# EAGLE board OOBD-Cup_v5-EuroPCB (EAGLE 5.11), part 1 of 4
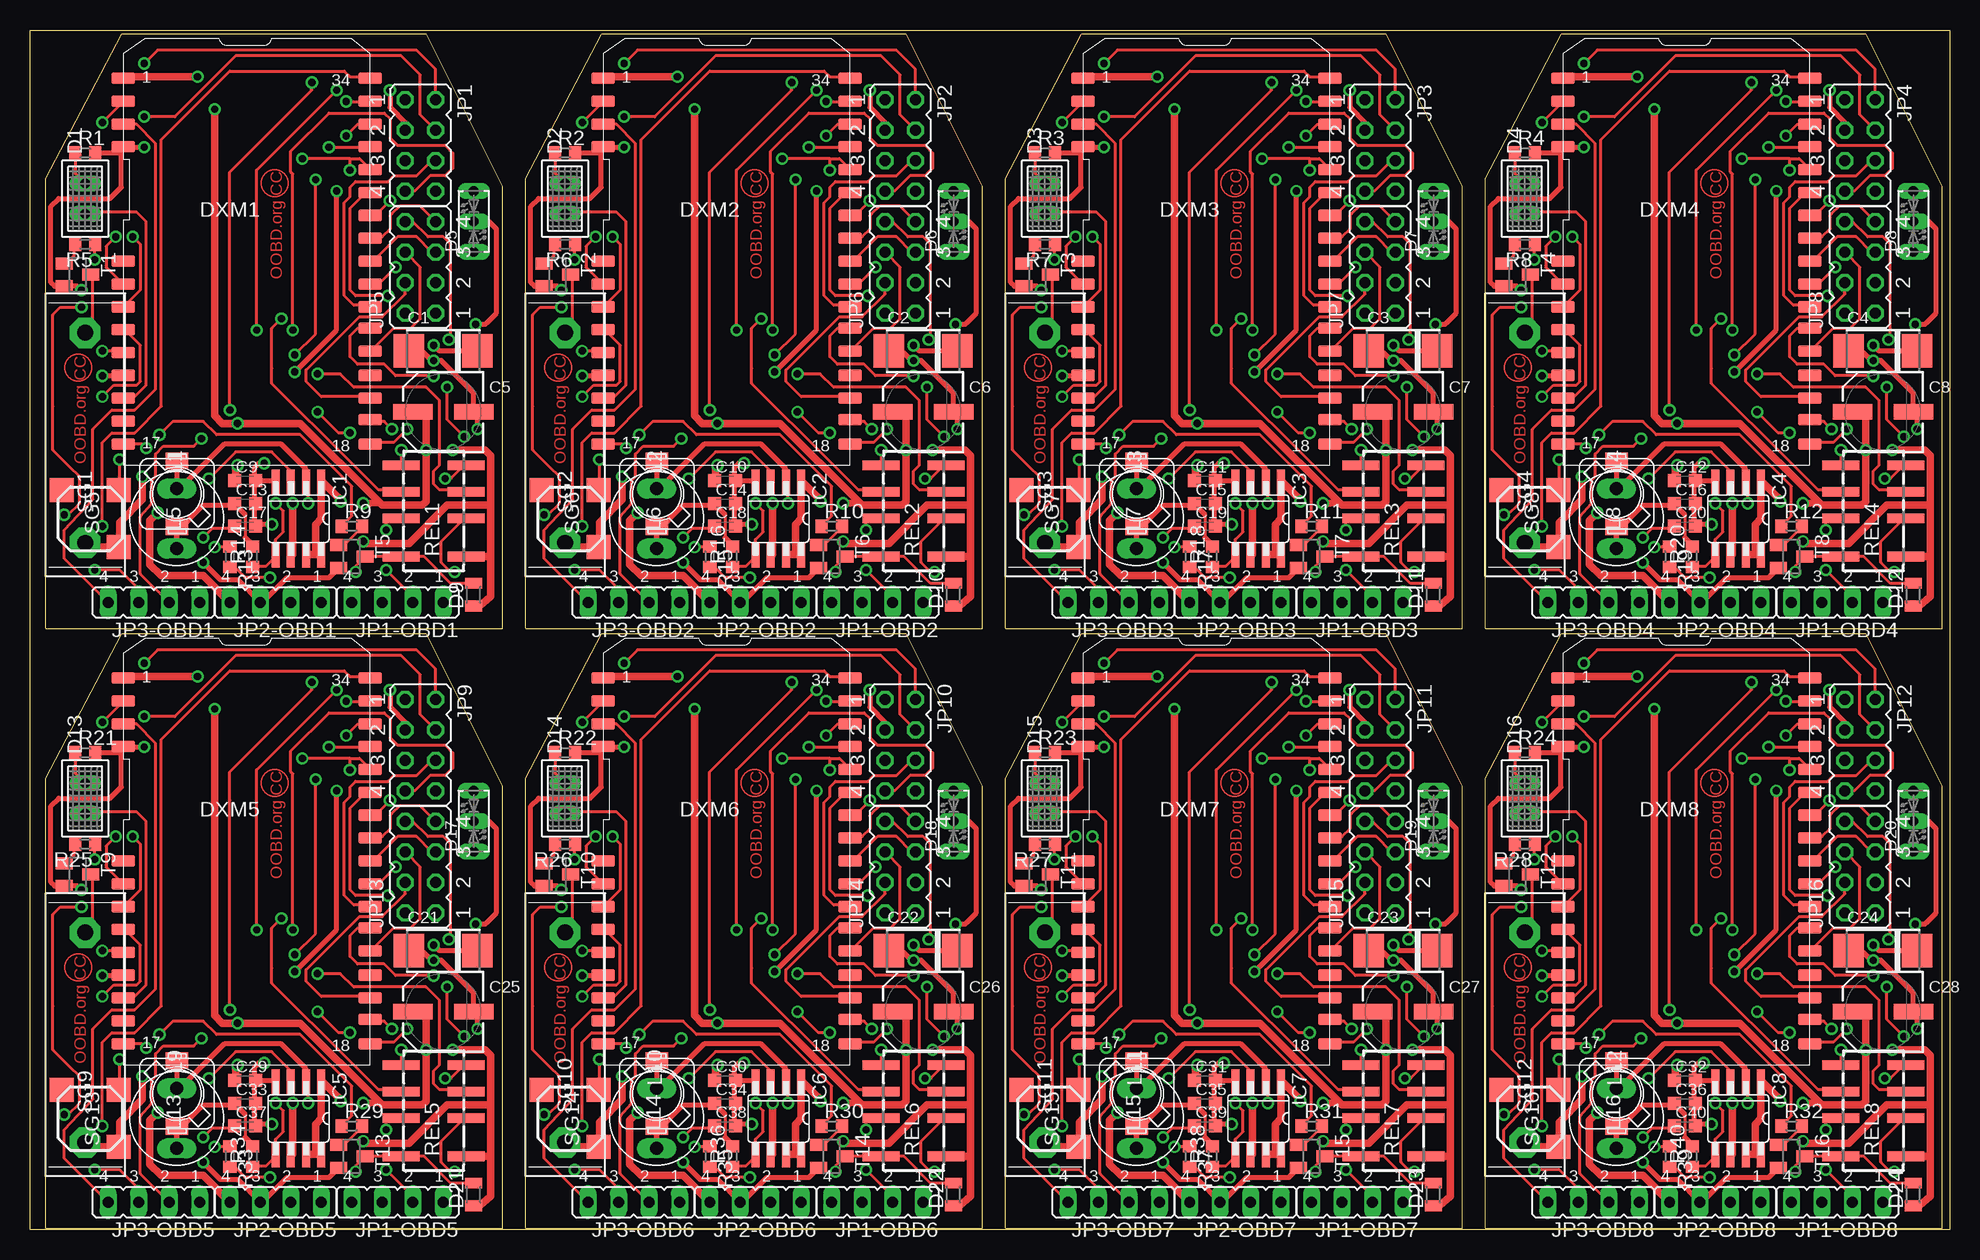
[diagram p0: board, top side]
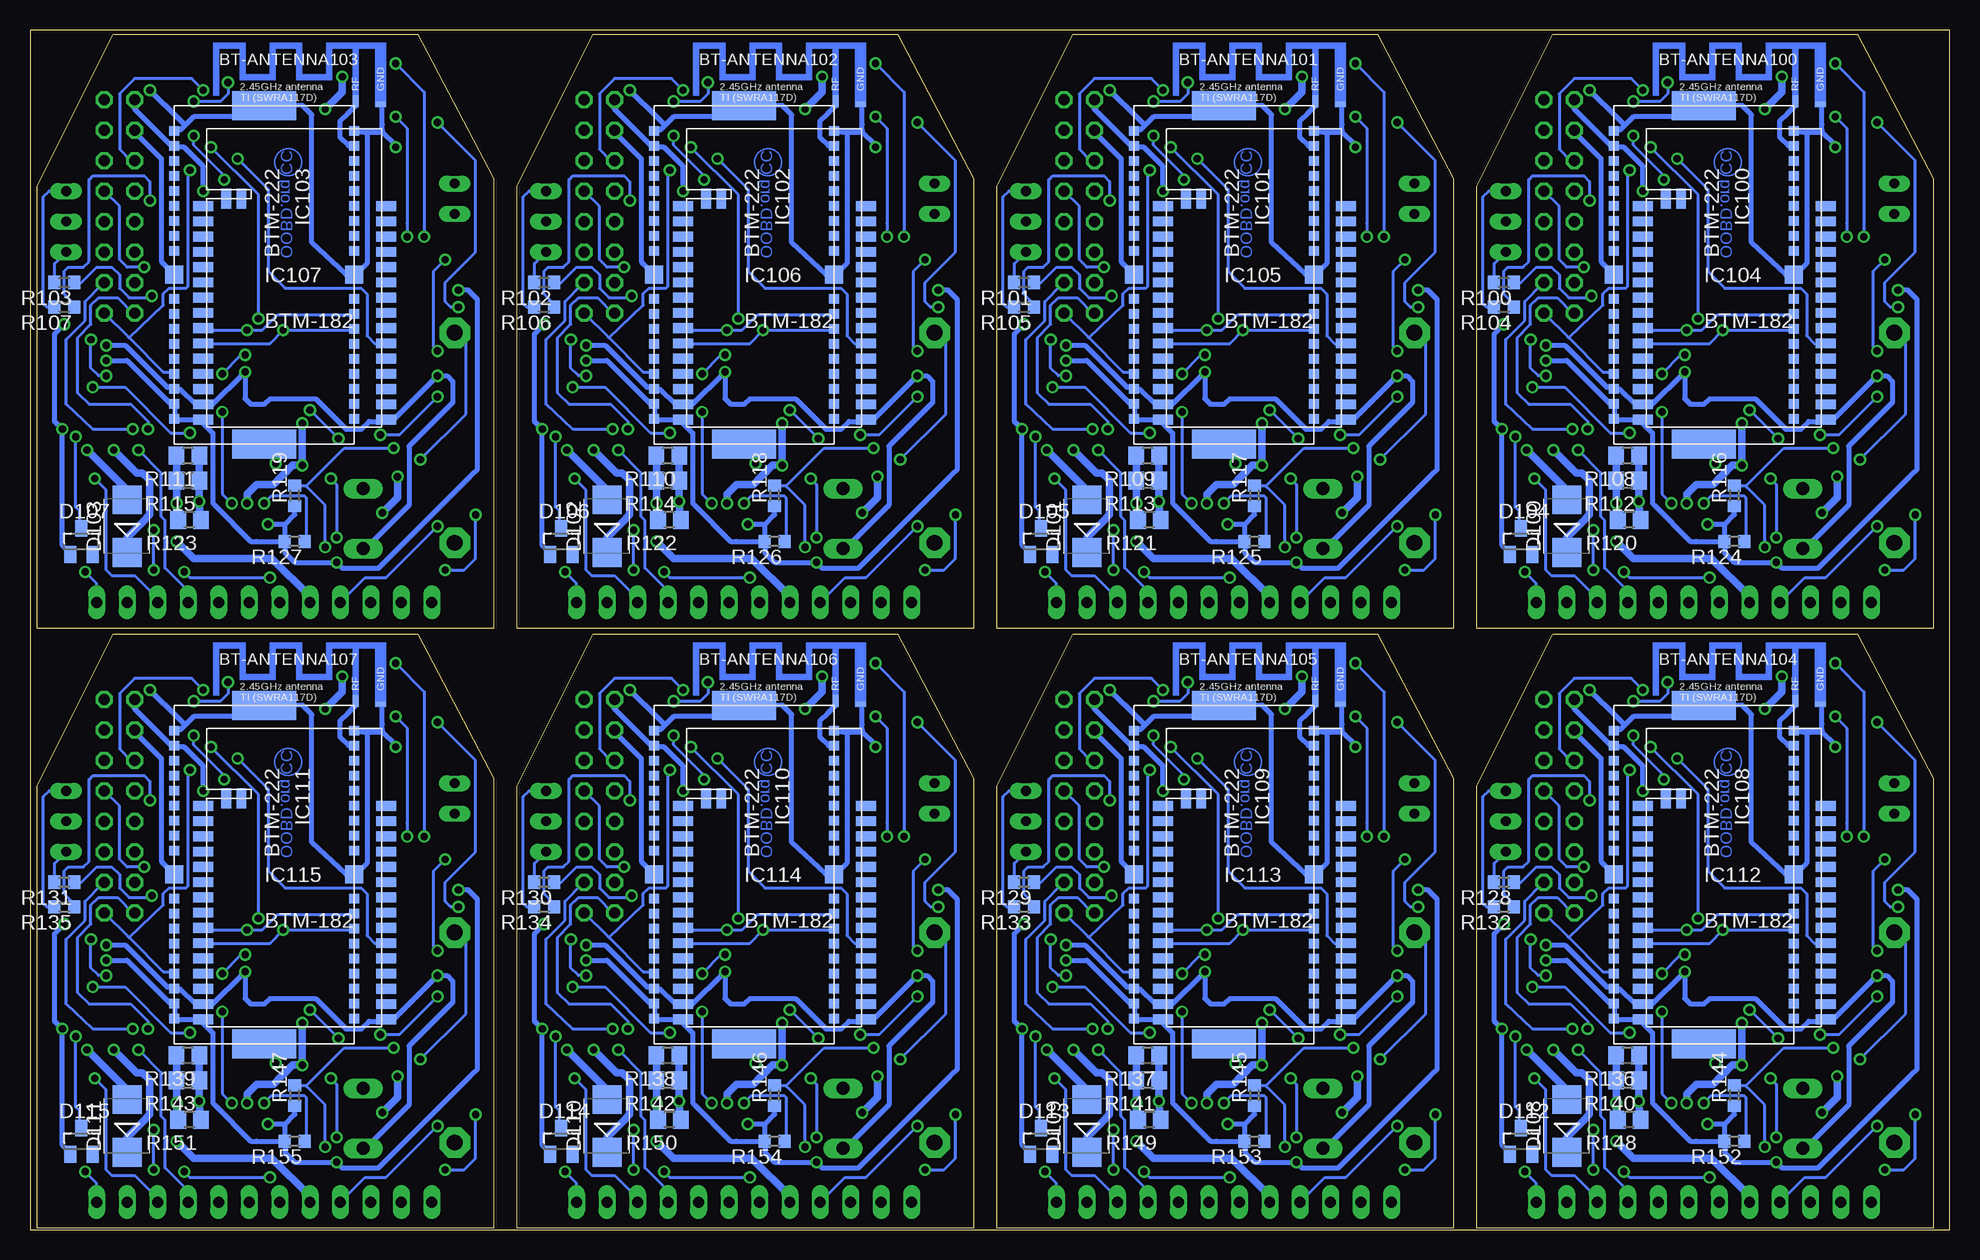
[diagram p1: board, bottom side, seen from below]

Size 160 x 100 mm. Coordinates in mm from the lower left corner, seen from the top.
Outline: 1.31,50.12 39.4,50.12 39.4,86.96 33.05,99.65
Outline: 1.3,50.13 1.3,87.59
Outline: 1.31,87.59 7.65,99.65 33.04,99.65
Outline: 41.31,50.12 79.4,50.12 79.4,86.96 73.05,99.65
Outline: 41.3,50.13 41.3,87.59
Outline: 41.31,87.59 47.65,99.65 73.04,99.65
Outline: 81.31,50.12 119.4,50.12 119.4,86.96 113.05,99.65
Outline: 81.3,50.13 81.3,87.59
Outline: 81.31,87.59 87.65,99.65 113.04,99.65
Outline: 121.31,50.12 159.4,50.12 159.4,86.96 153.05,99.65
Outline: 121.3,50.13 121.3,87.59
Outline: 121.31,87.59 127.65,99.65 153.04,99.65
Outline: 1.31,0.12 39.4,0.12 39.4,36.96 33.05,49.65
Outline: 1.3,0.13 1.3,37.59
Outline: 1.31,37.59 7.65,49.65 33.04,49.65
Outline: 41.31,0.12 79.4,0.12 79.4,36.96 73.05,49.65
Outline: 41.3,0.13 41.3,37.59
Outline: 41.31,37.59 47.65,49.65 73.04,49.65
Outline: 81.31,0.12 119.4,0.12 119.4,36.96 113.05,49.65
Outline: 81.3,0.13 81.3,37.59
Outline: 81.31,37.59 87.65,49.65 113.04,49.65
Outline: 121.31,0.12 159.4,0.12 159.4,36.96 153.05,49.65
Outline: 121.3,0.13 121.3,37.59
Outline: 121.31,37.59 127.65,49.65 153.04,49.65
Outline: 0,100 160,100 160,0 0,0 0,100
Copper layers (1*16): Top 0.035mm / dielectric 1.5mm / Bottom 0.035mm
Design rules "default *": minimum track width 10mil, minimum drill 24mil, track to track 8mil, track to pad 8mil, pad to pad 8mil, via to via 8mil, smd to smd 8mil, copper to edge 12mil, drill to drill 8mil, minimum pad ring 10mil, minimum via ring 8mil, stop-mask expansion 4mil, vias tented up to drill 0mil, thermal gap 10mil

## Footprints (pad centres in the part's own frame; a part is rotated, then mirrored left to right if it is on the bottom)
SWRA117D_RIGHT = smd 0.813 x 0.406: GND -0.45,0.25 | smd 0.508 x 1.016: RF -2.55,0.5
C6032-TE-C = smd 2.54 x 2.794: + 2.857,0; - -2.857,0
SV-D = smd 3.302 x 1.27: + -2.54,0; - 2.54,0
C0603K = smd 1.05 x 1.08: 1 -0.875,0; 2 0.875,0
U57X32 = drill 0.813 long: A -1.27,0; K 1.27,0
DUOLED2X5 = drill 0.813 long: AG -2.54,0; AR 2.54,0; K 0,0
MICROMELF-W = smd 0.9 x 1.4: A 0.95,0; C -0.95,0
SMB = smd 2.4 x 2.4: A 2.2,0; C -2.2,0
SOT23 = smd 1 x 1.4: 1 -0.95,-1.1; 2 0.95,-1.1; 3 0,1.1
DMX1-MINI = smd 1.93 x 0.965: 1 0,32.258; 2 0,30.353; 3 0,28.448; 4 0,26.543; 9 0,17.018; 10 0,15.113; 11 0,13.208; 12 0,11.303; 13 0,9.398; 14 0,7.493; 15 0,5.588; 16 0,3.683; 17 0,1.778; 18 20.574,1.778; 19 20.574,3.81; 20 20.574,5.588; 21 20.574,7.493; 22 20.574,9.525; 23 20.574,11.43; 24 20.574,13.208; 25 20.574,15.113; 26 20.574,17.018; 27 20.574,18.923; 28 20.574,20.828; 29 20.574,22.733; 30 20.574,24.638; 31 20.574,26.543; 32 20.574,28.448; 33 20.574,30.353; 34 20.574,32.258
SO8 = smd 0.66 x 2.032: 1 -1.905,-3.073; 2 -0.635,-3.073; 3 0.635,-3.073; 4 1.905,-3.073; 5 1.905,3.073; 6 0.635,3.073; 7 -0.635,3.073; 8 -1.905,3.073
BTM-222 = smd 0.8 x 0.8: P$1 -12.635,-7.5; P$2 -11.385,-7.5; P$3 -10.135,-7.5; P$4 -8.885,-7.5; P$5 -7.635,-7.5; P$6 -6.385,-7.5; P$7 -5.135,-7.5; P$8 -3.885,-7.5; P$9 -2.635,-7.5; P$11 1.365,-7.5; P$12 2.615,-7.5; P$13 3.865,-7.5; P$14 5.115,-7.5; P$15 6.365,-7.5; P$16 7.615,-7.5; P$17 8.865,-7.5; P$18 10.115,-7.5; P$19 11.365,-7.5; P$20 11.365,7.5; P$21 10.115,7.5; P$22 8.865,7.5; P$23 7.615,7.5; P$24 6.365,7.5; P$25 5.115,7.5; P$26 3.865,7.5; P$27 2.615,7.5; P$28 1.365,7.5; P$30 -2.635,7.5; P$31 -3.885,7.5; P$32 -5.135,7.5; P$33 -6.385,7.5; P$34 -7.635,7.5; P$35 -8.885,7.5; P$36 -10.135,7.5; P$37 -11.385,7.5; P$38 -12.635,7.5 | smd 1.5 x 1.5: P$10 -0.635,-7.5; P$29 -0.635,7.5 | smd 2.4 x 5.3: P$AGND -14.735,0; P$BGND 13.465,0
BTM-182 = smd 1.676 x 0.813: P$1 -7.62,7.62; P$2 -7.62,6.35; P$3 -7.62,5.08; P$4 -7.62,3.81; P$5 -7.62,2.54; P$6 -7.62,1.27; P$7 -7.62,0; P$8 -7.62,-1.27; P$9 -7.62,-2.54; P$10 -7.62,-3.81; P$11 -7.62,-5.08; P$12 -7.62,-6.35; P$13 -7.62,-7.62; P$14 -7.62,-8.89; P$15 -7.62,-10.16; P$16 7.62,-10.16; P$17 7.62,-8.89; P$18 7.62,-7.62; P$19 7.62,-6.35; P$20 7.62,-5.08; P$21 7.62,-3.81; P$22 7.62,-2.54; P$23 7.62,-1.27; P$24 7.62,0; P$25 7.62,1.27; P$26 7.62,2.54; P$27 7.62,3.81; P$28 7.62,5.08; P$29 7.62,6.35; P$30 7.62,7.62 | smd 0.813 x 1.676: P$31 -4.445,8.255; P$32 -5.715,8.255
JP4Q = drill 0.914 octagon: 1 -3.81,-1.27; 2 -3.81,1.27; 3 -1.27,-1.27; 4 -1.27,1.27; 5 1.27,-1.27; 6 1.27,1.27; 7 3.81,-1.27; 8 3.81,1.27
JP4 = drill 0.914 long: 1 -3.81,0; 2 -1.27,0; 3 1.27,0; 4 3.81,0
PIS2408 = smd 1.9 x 1.4: P$1 0,2.75; P$2 0,-2.75
07HCP-XXXX-50 = drill 1.1 long: 1 -2.5,0; 2 2.5,0
R0603 = smd 1 x 1.1: 1 -0.85,0; 2 0.85,0
R0805 = smd 1.3 x 1.5: 1 -0.95,0; 2 0.95,0
FTR-B4GA = smd 0.8 x 3.1: 1 -3.8,-3.167; 2 -0.625,-3.167; 3 1.597,-3.167; 4 3.82,-3.167; 5 3.82,2.23; 6 1.597,2.23; 7 -0.625,2.23; 8 -3.8,2.23
PMB24F/V = drill 1.321 pad 2.54 octagon: 1 -9.004,0; 2 8.504,0
BME0603SA = smd 2 x 2: (+)LEAD 4.295,0.425; (-)LEAD -0.475,0.425; NC -0.475,-4.345

## Placement (x,y rotation side)
BT-ANTENNA100  [SWRA117D_RIGHT]  10.32,93.56 0 bottom
BT-ANTENNA101  [SWRA117D_RIGHT]  50.32,93.56 0 bottom
BT-ANTENNA102  [SWRA117D_RIGHT]  90.32,93.56 0 bottom
BT-ANTENNA103  [SWRA117D_RIGHT]  130.32,93.56 0 bottom
BT-ANTENNA104  [SWRA117D_RIGHT]  10.32,43.56 0 bottom
BT-ANTENNA105  [SWRA117D_RIGHT]  50.32,43.56 0 bottom
BT-ANTENNA106  [SWRA117D_RIGHT]  90.32,43.56 0 bottom
BT-ANTENNA107  [SWRA117D_RIGHT]  130.32,43.56 0 bottom
C1  220µF/6V  [C6032-TE-C]  34.45,73.24 0 top
C2  220µF/6V  [C6032-TE-C]  74.45,73.24 0 top
C3  220µF/6V  [C6032-TE-C]  114.45,73.24 0 top
C4  220µF/6V  [C6032-TE-C]  154.45,73.24 0 top
C5  47µ/35V  [SV-D]  34.45,68.16 0 top
C6  47µ/35V  [SV-D]  74.45,68.16 0 top
C7  47µ/35V  [SV-D]  114.45,68.16 0 top
C8  47µ/35V  [SV-D]  154.45,68.16 0 top
C9  100nF  [C0603K]  17.94,62.44 0 top
C10  100nF  [C0603K]  57.94,62.44 0 top
C11  100nF  [C0603K]  97.94,62.44 0 top
C12  100nF  [C0603K]  137.94,62.44 0 top
C13  1µF  [C0603K]  17.94,60.54 0 top
C14  1µF  [C0603K]  57.94,60.54 0 top
C15  1µF  [C0603K]  97.94,60.54 0 top
C16  1µF  [C0603K]  137.94,60.54 0 top
C17  270pF  [C0603K]  17.94,58.63 0 top
C18  270pF  [C0603K]  57.94,58.63 0 top
C19  270pF  [C0603K]  97.94,58.63 0 top
C20  270pF  [C0603K]  137.94,58.63 0 top
C21  220µF/6V  [C6032-TE-C]  34.45,23.24 0 top
C22  220µF/6V  [C6032-TE-C]  74.45,23.24 0 top
C23  220µF/6V  [C6032-TE-C]  114.45,23.24 0 top
C24  220µF/6V  [C6032-TE-C]  154.45,23.24 0 top
C25  47µ/35V  [SV-D]  34.45,18.16 0 top
C26  47µ/35V  [SV-D]  74.45,18.16 0 top
C27  47µ/35V  [SV-D]  114.45,18.16 0 top
C28  47µ/35V  [SV-D]  154.45,18.16 0 top
C29  100nF  [C0603K]  17.94,12.44 0 top
C30  100nF  [C0603K]  57.94,12.44 0 top
C31  100nF  [C0603K]  97.94,12.44 0 top
C32  100nF  [C0603K]  137.94,12.44 0 top
C33  1µF  [C0603K]  17.94,10.54 0 top
C34  1µF  [C0603K]  57.94,10.54 0 top
C35  1µF  [C0603K]  97.94,10.54 0 top
C36  1µF  [C0603K]  137.94,10.54 0 top
C37  270pF  [C0603K]  17.94,8.63 0 top
C38  270pF  [C0603K]  57.94,8.63 0 top
C39  270pF  [C0603K]  97.94,8.63 0 top
C40  270pF  [C0603K]  137.94,8.63 0 top
D1  Ge, Low Current  [U57X32]  4.6,85.94 90 top
D2  Ge, Low Current  [U57X32]  44.6,85.94 90 top
D3  Ge, Low Current  [U57X32]  84.6,85.94 90 top
D4  Ge, Low Current  [U57X32]  124.6,85.94 90 top
D5  Rt/Gr  [DUOLED2X5]  36.99,84.03 90 top
D6  Rt/Gr  [DUOLED2X5]  76.99,84.03 90 top
D7  Rt/Gr  [DUOLED2X5]  116.99,84.03 90 top
D8  Rt/Gr  [DUOLED2X5]  156.99,84.03 90 top
D9  1N4148  [MICROMELF-W]  36.99,52.92 90 top
D10  1N4148  [MICROMELF-W]  76.99,52.92 90 top
D11  1N4148  [MICROMELF-W]  116.99,52.92 90 top
D12  1N4148  [MICROMELF-W]  156.99,52.92 90 top
D13  Ge, Low Current  [U57X32]  4.6,35.94 90 top
D14  Ge, Low Current  [U57X32]  44.6,35.94 90 top
D15  Ge, Low Current  [U57X32]  84.6,35.94 90 top
D16  Ge, Low Current  [U57X32]  124.6,35.94 90 top
D17  Rt/Gr  [DUOLED2X5]  36.99,34.03 90 top
D18  Rt/Gr  [DUOLED2X5]  76.99,34.03 90 top
D19  Rt/Gr  [DUOLED2X5]  116.99,34.03 90 top
D20  Rt/Gr  [DUOLED2X5]  156.99,34.03 90 top
D21  1N4148  [MICROMELF-W]  36.99,2.92 90 top
D22  1N4148  [MICROMELF-W]  76.99,2.92 90 top
D23  1N4148  [MICROMELF-W]  116.99,2.92 90 top
D24  1N4148  [MICROMELF-W]  156.99,2.92 90 top
D100  B140  [SMB]  31.91,58.63 90 bottom
D101  B140  [SMB]  71.91,58.63 90 bottom
D102  B140  [SMB]  111.91,58.63 90 bottom
D103  B140  [SMB]  151.91,58.63 90 bottom
D104  BAS40  [SOT23]  35.72,57.36 0 bottom
D105  BAS40  [SOT23]  75.72,57.36 0 bottom
D106  BAS40  [SOT23]  115.72,57.36 0 bottom
D107  BAS40  [SOT23]  155.72,57.36 0 bottom
D108  B140  [SMB]  31.91,8.63 90 bottom
D109  B140  [SMB]  71.91,8.63 90 bottom
D110  B140  [SMB]  111.91,8.63 90 bottom
D111  B140  [SMB]  151.91,8.63 90 bottom
D112  BAS40  [SOT23]  35.72,7.36 0 bottom
D113  BAS40  [SOT23]  75.72,7.36 0 bottom
D114  BAS40  [SOT23]  115.72,7.36 0 bottom
D115  BAS40  [SOT23]  155.72,7.36 0 bottom
DXM1  IC1  [DMX1-MINI]  7.78,63.71 0 top
DXM2  IC1  [DMX1-MINI]  47.78,63.71 0 top
DXM3  IC1  [DMX1-MINI]  87.78,63.71 0 top
DXM4  IC1  [DMX1-MINI]  127.78,63.71 0 top
DXM5  IC1  [DMX1-MINI]  7.78,13.71 0 top
DXM6  IC1  [DMX1-MINI]  47.78,13.71 0 top
DXM7  IC1  [DMX1-MINI]  87.78,13.71 0 top
DXM8  IC1  [DMX1-MINI]  127.78,13.71 0 top
IC1  MC34063-SO  [SO8]  22.38,59.27 180 top
IC2  MC34063-SO  [SO8]  62.38,59.27 180 top
IC3  MC34063-SO  [SO8]  102.38,59.27 180 top
IC4  MC34063-SO  [SO8]  142.38,59.27 180 top
IC5  MC34063-SO  [SO8]  22.38,9.27 180 top
IC6  MC34063-SO  [SO8]  62.38,9.27 180 top
IC7  MC34063-SO  [SO8]  102.38,9.27 180 top
IC8  MC34063-SO  [SO8]  142.38,9.27 180 top
IC100  BTM-222  [BTM-222]  20.48,78.95 270 bottom
IC101  BTM-222  [BTM-222]  60.48,78.95 270 bottom
IC102  BTM-222  [BTM-222]  100.48,78.95 270 bottom
IC103  BTM-222  [BTM-222]  140.48,78.95 270 bottom
IC104  BTM-182  [BTM-182]  17.94,77.68 0 bottom
IC105  BTM-182  [BTM-182]  57.94,77.68 0 bottom
IC106  BTM-182  [BTM-182]  97.94,77.68 0 bottom
IC107  BTM-182  [BTM-182]  137.94,77.68 0 bottom
IC108  BTM-222  [BTM-222]  20.48,28.95 270 bottom
IC109  BTM-222  [BTM-222]  60.48,28.95 270 bottom
IC110  BTM-222  [BTM-222]  100.48,28.95 270 bottom
IC111  BTM-222  [BTM-222]  140.48,28.95 270 bottom
IC112  BTM-182  [BTM-182]  17.94,27.68 0 bottom
IC113  BTM-182  [BTM-182]  57.94,27.68 0 bottom
IC114  BTM-182  [BTM-182]  97.94,27.68 0 bottom
IC115  BTM-182  [BTM-182]  137.94,27.68 0 bottom
JP1  Programm  [JP4Q]  32.54,90.38 270 top
JP1-OBD1  [JP4]  30.64,52.28 180 top
JP1-OBD2  [JP4]  70.64,52.28 180 top
JP1-OBD3  [JP4]  110.64,52.28 180 top
JP1-OBD4  [JP4]  150.64,52.28 180 top
JP1-OBD5  [JP4]  30.64,2.28 180 top
JP1-OBD6  [JP4]  70.64,2.28 180 top
JP1-OBD7  [JP4]  110.64,2.28 180 top
JP1-OBD8  [JP4]  150.64,2.28 180 top
JP2  Programm  [JP4Q]  72.54,90.38 270 top
JP2-OBD1  [JP4]  20.48,52.28 180 top
JP2-OBD2  [JP4]  60.48,52.28 180 top
JP2-OBD3  [JP4]  100.48,52.28 180 top
JP2-OBD4  [JP4]  140.48,52.28 180 top
JP2-OBD5  [JP4]  20.48,2.28 180 top
JP2-OBD6  [JP4]  60.48,2.28 180 top
JP2-OBD7  [JP4]  100.48,2.28 180 top
JP2-OBD8  [JP4]  140.48,2.28 180 top
JP3  Programm  [JP4Q]  112.54,90.38 270 top
JP3-OBD1  [JP4]  10.32,52.28 180 top
JP3-OBD2  [JP4]  50.32,52.28 180 top
JP3-OBD3  [JP4]  90.32,52.28 180 top
JP3-OBD4  [JP4]  130.32,52.28 180 top
JP3-OBD5  [JP4]  10.32,2.28 180 top
JP3-OBD6  [JP4]  50.32,2.28 180 top
JP3-OBD7  [JP4]  90.32,2.28 180 top
JP3-OBD8  [JP4]  130.32,2.28 180 top
JP4  Programm  [JP4Q]  152.54,90.38 270 top
JP5  SPI / SD-Card  [JP4Q]  32.54,80.22 90 top
JP6  SPI / SD-Card  [JP4Q]  72.54,80.22 90 top
JP7  SPI / SD-Card  [JP4Q]  112.54,80.22 90 top
JP8  SPI / SD-Card  [JP4Q]  152.54,80.22 90 top
JP9  Programm  [JP4Q]  32.54,40.38 270 top
JP10  Programm  [JP4Q]  72.54,40.38 270 top
JP11  Programm  [JP4Q]  112.54,40.38 270 top
JP12  Programm  [JP4Q]  152.54,40.38 270 top
JP13  SPI / SD-Card  [JP4Q]  32.54,30.22 90 top
JP14  SPI / SD-Card  [JP4Q]  72.54,30.22 90 top
JP15  SPI / SD-Card  [JP4Q]  112.54,30.22 90 top
JP16  SPI / SD-Card  [JP4Q]  152.54,30.22 90 top
L1  47uH  [PIS2408]  12.25,61.33 180 top
L2  47uH  [PIS2408]  52.25,61.33 180 top
L3  47uH  [PIS2408]  92.25,61.33 180 top
L4  47uH  [PIS2408]  132.25,61.33 180 top
L5  47µH  [07HCP-XXXX-50]  12.22,59.27 90 top
L6  47µH  [07HCP-XXXX-50]  52.22,59.27 90 top
L7  47µH  [07HCP-XXXX-50]  92.22,59.27 90 top
L8  47µH  [07HCP-XXXX-50]  132.22,59.27 90 top
L9  47uH  [PIS2408]  12.25,11.33 180 top
L10  47uH  [PIS2408]  52.25,11.33 180 top
L11  47uH  [PIS2408]  92.25,11.33 180 top
L12  47uH  [PIS2408]  132.25,11.33 180 top
L13  47µH  [07HCP-XXXX-50]  12.22,9.27 90 top
L14  47µH  [07HCP-XXXX-50]  52.22,9.27 90 top
L15  47µH  [07HCP-XXXX-50]  92.22,9.27 90 top
L16  47µH  [07HCP-XXXX-50]  132.22,9.27 90 top
R1  680R  [R0603]  4.6,89.75 0 top
R2  680R  [R0603]  44.6,89.75 0 top
R3  680R  [R0603]  84.6,89.75 0 top
R4  680R  [R0603]  124.6,89.75 0 top
R5  4K7  [R0603]  4.6,82.13 180 top
R6  4K7  [R0603]  44.6,82.13 180 top
R7  4K7  [R0603]  84.6,82.13 180 top
R8  4K7  [R0603]  124.6,82.13 180 top
R9  4K7  [R0603]  26.83,58.63 0 top
R10  4K7  [R0603]  66.83,58.63 0 top
R11  4K7  [R0603]  106.83,58.63 0 top
R12  4K7  [R0603]  146.83,58.63 0 top
R13  180k  [R0603]  16.67,56.09 270 top
R14  5k6  [R0603]  18.57,56.09 90 top
R15  180k  [R0603]  56.67,56.09 270 top
R16  5k6  [R0603]  58.57,56.09 90 top
R17  180k  [R0603]  96.67,56.09 270 top
R18  5k6  [R0603]  98.57,56.09 90 top
R19  180k  [R0603]  136.67,56.09 270 top
R20  5k6  [R0603]  138.57,56.09 90 top
R21  680R  [R0603]  4.6,39.75 0 top
R22  680R  [R0603]  44.6,39.75 0 top
R23  680R  [R0603]  84.6,39.75 0 top
R24  680R  [R0603]  124.6,39.75 0 top
R25  4K7  [R0603]  4.6,32.13 180 top
R26  4K7  [R0603]  44.6,32.13 180 top
R27  4K7  [R0603]  84.6,32.13 180 top
R28  4K7  [R0603]  124.6,32.13 180 top
R29  4K7  [R0603]  26.83,8.63 0 top
R30  4K7  [R0603]  66.83,8.63 0 top
R31  4K7  [R0603]  106.83,8.63 0 top
R32  4K7  [R0603]  146.83,8.63 0 top
R33  180k  [R0603]  16.67,6.09 270 top
R34  5k6  [R0603]  18.57,6.09 90 top
R35  180k  [R0603]  56.67,6.09 270 top
R36  5k6  [R0603]  58.57,6.09 90 top
R37  180k  [R0603]  96.67,6.09 270 top
R38  5k6  [R0603]  98.57,6.09 90 top
R39  180k  [R0603]  136.67,6.09 270 top
R40  5k6  [R0603]  138.57,6.09 90 top
R100  82R  [R0603]  37.15,78.95 180 bottom
R101  82R  [R0603]  77.14,78.95 180 bottom
R102  82R  [R0603]  117.14,78.95 180 bottom
R103  82R  [R0603]  157.15,78.95 180 bottom
R104  82R  [R0603]  37.15,76.89 180 bottom
R105  82R  [R0603]  77.14,76.89 180 bottom
R106  82R  [R0603]  117.14,76.89 180 bottom
R107  82R  [R0603]  157.15,76.89 180 bottom
R108  1R  [R0805]  26.83,64.51 180 bottom
R109  1R  [R0805]  66.83,64.51 180 bottom
R110  1R  [R0805]  106.83,64.51 180 bottom
R111  1R  [R0805]  146.83,64.51 180 bottom
R112  1R  [R0805]  26.83,62.44 180 bottom
R113  1R  [R0805]  66.83,62.44 180 bottom
R114  1R  [R0805]  106.83,62.44 180 bottom
R115  1R  [R0805]  146.83,62.44 180 bottom
R116  47k  [R0603]  17.94,61.17 90 bottom
R117  47k  [R0603]  57.94,61.17 90 bottom
R118  47k  [R0603]  97.94,61.17 90 bottom
R119  47k  [R0603]  137.94,61.17 90 bottom
R120  1R  [R0805]  26.7,59.16 180 bottom
R121  1R  [R0805]  66.7,59.16 180 bottom
R122  1R  [R0805]  106.7,59.16 180 bottom
R123  1R  [R0805]  146.7,59.16 180 bottom
R124  3k3  [R0603]  17.94,57.36 180 bottom
R125  3k3  [R0603]  57.94,57.36 180 bottom
R126  3k3  [R0603]  97.94,57.36 180 bottom
R127  3k3  [R0603]  137.94,57.36 180 bottom
R128  82R  [R0603]  37.15,28.95 180 bottom
R129  82R  [R0603]  77.14,28.95 180 bottom
R130  82R  [R0603]  117.14,28.95 180 bottom
R131  82R  [R0603]  157.15,28.95 180 bottom
R132  82R  [R0603]  37.15,26.89 180 bottom
R133  82R  [R0603]  77.14,26.89 180 bottom
R134  82R  [R0603]  117.14,26.89 180 bottom
R135  82R  [R0603]  157.15,26.89 180 bottom
R136  1R  [R0805]  26.83,14.51 180 bottom
R137  1R  [R0805]  66.83,14.51 180 bottom
R138  1R  [R0805]  106.83,14.51 180 bottom
R139  1R  [R0805]  146.83,14.51 180 bottom
R140  1R  [R0805]  26.83,12.44 180 bottom
R141  1R  [R0805]  66.83,12.44 180 bottom
R142  1R  [R0805]  106.83,12.44 180 bottom
R143  1R  [R0805]  146.83,12.44 180 bottom
R144  47k  [R0603]  17.94,11.17 90 bottom
R145  47k  [R0603]  57.94,11.17 90 bottom
R146  47k  [R0603]  97.94,11.17 90 bottom
R147  47k  [R0603]  137.94,11.17 90 bottom
R148  1R  [R0805]  26.7,9.16 180 bottom
R149  1R  [R0805]  66.7,9.16 180 bottom
R150  1R  [R0805]  106.7,9.16 180 bottom
R151  1R  [R0805]  146.7,9.16 180 bottom
R152  3k3  [R0603]  17.94,7.36 180 bottom
R153  3k3  [R0603]  57.94,7.36 180 bottom
R154  3k3  [R0603]  97.94,7.36 180 bottom
R155  3k3  [R0603]  137.94,7.36 180 bottom
REL1  FTR-B4GA  [FTR-B4GA]  33.18,59.9 90 top
REL2  FTR-B4GA  [FTR-B4GA]  73.18,59.9 90 top
REL3  FTR-B4GA  [FTR-B4GA]  113.18,59.9 90 top
REL4  FTR-B4GA  [FTR-B4GA]  153.18,59.9 90 top
REL5  FTR-B4GA  [FTR-B4GA]  33.18,9.9 90 top
REL6  FTR-B4GA  [FTR-B4GA]  73.18,9.9 90 top
REL7  FTR-B4GA  [FTR-B4GA]  113.18,9.9 90 top
REL8  FTR-B4GA  [FTR-B4GA]  153.18,9.9 90 top
SG1  PMB24FV  [PMB24F/V]  4.6,66.25 90 top
SG2  PMB24FV  [PMB24F/V]  44.6,66.25 90 top
SG3  PMB24FV  [PMB24F/V]  84.6,66.25 90 top
SG4  PMB24FV  [PMB24F/V]  124.6,66.25 90 top
SG5  MBWOE  [BME0603SA]  6.98,61.17 270 top
SG6  MBWOE  [BME0603SA]  46.98,61.17 270 top
SG7  MBWOE  [BME0603SA]  86.98,61.17 270 top
SG8  MBWOE  [BME0603SA]  126.98,61.17 270 top
SG9  PMB24FV  [PMB24F/V]  4.6,16.25 90 top
SG10  PMB24FV  [PMB24F/V]  44.6,16.25 90 top
SG11  PMB24FV  [PMB24F/V]  84.6,16.25 90 top
SG12  PMB24FV  [PMB24F/V]  124.6,16.25 90 top
SG13  MBWOE  [BME0603SA]  6.98,11.17 270 top
SG14  MBWOE  [BME0603SA]  46.98,11.17 270 top
SG15  MBWOE  [BME0603SA]  86.98,11.17 270 top
SG16  MBWOE  [BME0603SA]  126.98,11.17 270 top
T1  BC847  [SOT23]  3.97,79.59 270 top
T2  BC847  [SOT23]  43.97,79.59 270 top
T3  BC847  [SOT23]  83.97,79.59 270 top
T4  BC847  [SOT23]  123.97,79.59 270 top
T5  BC847  [SOT23]  26.83,56.09 270 top
T6  BC847  [SOT23]  66.83,56.09 270 top
T7  BC847  [SOT23]  106.83,56.09 270 top
T8  BC847  [SOT23]  146.83,56.09 270 top
T9  BC847  [SOT23]  3.97,29.59 270 top
T10  BC847  [SOT23]  43.97,29.59 270 top
T11  BC847  [SOT23]  83.97,29.59 270 top
T12  BC847  [SOT23]  123.97,29.59 270 top
T13  BC847  [SOT23]  26.83,6.09 270 top
T14  BC847  [SOT23]  66.83,6.09 270 top
T15  BC847  [SOT23]  106.83,6.09 270 top
T16  BC847  [SOT23]  146.83,6.09 270 top

## Library data of the parts
BT-ANTENNA100-BT-ANTENNA107 = ant-planar-1
C1-C4 C21-C24 = rc-master
C5-C8 C25-C28 = cap-master
C9-C20 C29-C40 R1-R40 R100-R155 = rcl
D1-D8 D13-D20 = led
D9-D12 D21-D24 D100-D115 = diode
DXM1-DXM8 = DXM
IC1-IC8 = mc34063
IC100-IC103 IC108-IC111 = btm-222
IC104-IC107 IC112-IC115 = BTM182
JP1 JP1-OBD1-JP1-OBD8 JP2 JP2-OBD1-JP2-OBD8 JP3 JP3-OBD1-JP3-OBD8 JP4-JP16 = jumper
L1-L16 = Inductor-Fastron
REL1-REL8 = relay; MN: Fujitsu; MPN: FTR-B4GAxxxZ; OC_REICHELT: FTR-B4GA 12V
SG1-SG4 SG9-SG12 = buzzer; OC_CONRAD: Best.-Nr.: 752223 - 62 [Teilenummer: 185110]
SG5-SG8 SG13-SG16 = buzzer; MF: Grewus
T1-T16 = transistor

## Nets
3V3OUT1: DXM2.9
3V3OUT2: DXM3.9
3V3OUT3: DXM4.9
3V3OUT4: DXM5.9
3V3OUT5: DXM6.9
3V3OUT6: DXM7.9
3V3OUT7: DXM8.9
3V3OUT8: DXM1.9
12V_DOUT1: C6.+ C10.1 D101.C DXM2.1 IC2.6 R109.2 R113.2 R121.2
12V_DOUT2: C7.+ C11.1 D102.C DXM3.1 IC3.6 R110.2 R114.2 R122.2
12V_DOUT3: C8.+ C12.1 D103.C DXM4.1 IC4.6 R111.2 R115.2 R123.2
12V_DOUT4: C25.+ C29.1 D108.C DXM5.1 IC5.6 R136.2 R140.2 R148.2
12V_DOUT5: C26.+ C30.1 D109.C DXM6.1 IC6.6 R137.2 R141.2 R149.2
12V_DOUT6: C27.+ C31.1 D110.C DXM7.1 IC7.6 R138.2 R142.2 R150.2
12V_DOUT7: C28.+ C32.1 D111.C DXM8.1 IC8.6 R139.2 R143.2 R151.2
12V_DOUT8: C5.+ C9.1 D100.C DXM1.1 IC1.6 R108.2 R112.2 R120.2
+3V1: C2.+ C14.1 DXM2.14 IC101.P$2 IC101.P$17 IC105.P$14 IC105.P$16 JP2.1 L2.P$1 L6.1 R16.2
+3V2: C3.+ C15.1 DXM3.14 IC102.P$2 IC102.P$17 IC106.P$14 IC106.P$16 JP3.1 L3.P$1 L7.1 R18.2
+3V3: C4.+ C16.1 DXM4.14 IC103.P$2 IC103.P$17 IC107.P$14 IC107.P$16 JP4.1 L4.P$1 L8.1 R20.2
+3V4: C21.+ C33.1 DXM5.14 IC108.P$2 IC108.P$17 IC112.P$14 IC112.P$16 JP9.1 L9.P$1 L13.1 R34.2
+3V5: C22.+ C34.1 DXM6.14 IC109.P$2 IC109.P$17 IC113.P$14 IC113.P$16 JP10.1 L10.P$1 L14.1 R36.2
+3V6: C23.+ C35.1 DXM7.14 IC110.P$2 IC110.P$17 IC114.P$14 IC114.P$16 JP11.1 L11.P$1 L15.1 R38.2
+3V7: C24.+ C36.1 DXM8.14 IC111.P$2 IC111.P$17 IC115.P$14 IC115.P$16 JP12.1 L12.P$1 L16.1 R40.2
+3V9: C1.+ C13.1 DXM1.14 IC100.P$2 IC100.P$17 IC104.P$14 IC104.P$16 JP1.1 L1.P$1 L5.1 R14.2
+12V1: D10.C D101.A JP2-OBD2.4 REL2.1 SG2.1 SG6.(+)LEAD
+12V2: D11.C D102.A JP2-OBD3.4 REL3.1 SG3.1 SG7.(+)LEAD
+12V3: D12.C D103.A JP2-OBD4.4 REL4.1 SG4.1 SG8.(+)LEAD
+12V4: D21.C D108.A JP2-OBD5.4 REL5.1 SG9.1 SG13.(+)LEAD
+12V5: D22.C D109.A JP2-OBD6.4 REL6.1 SG10.1 SG14.(+)LEAD
+12V6: D23.C D110.A JP2-OBD7.4 REL7.1 SG11.1 SG15.(+)LEAD
+12V7: D24.C D111.A JP2-OBD8.4 REL8.1 SG12.1 SG16.(+)LEAD
+12V8: D9.C D100.A JP2-OBD1.4 REL1.1 SG1.1 SG5.(+)LEAD
A1: DXM2.18 JP6.3
A2: DXM3.18 JP7.3
A3: DXM4.18 JP8.3
A4: DXM5.18 JP13.3
A5: DXM6.18 JP14.3
A6: DXM7.18 JP15.3
A7: DXM8.18 JP16.3
A8: DXM1.18 JP5.3
BOOT1: DXM2.10 JP2.2
BOOT2: DXM3.10 JP3.2
BOOT3: DXM4.10 JP4.2
BOOT4: DXM5.10 JP9.2
BOOT5: DXM6.10 JP10.2
BOOT6: DXM7.10 JP11.2
BOOT7: DXM8.10 JP12.2
BOOT8: DXM1.10 JP1.2
CS1: DXM2.19 JP6.2
CS2: DXM3.19 JP7.2
CS3: DXM4.19 JP8.2
CS4: DXM5.19 JP13.2
CS5: DXM6.19 JP14.2
CS6: DXM7.19 JP15.2
CS7: DXM8.19 JP16.2
CS8: DXM1.19 JP5.2
CTS1: DXM2.26 JP6.5
CTS2: DXM3.26 JP7.5
CTS3: DXM4.26 JP8.5
CTS4: DXM5.26 JP13.5
CTS5: DXM6.26 JP14.5
CTS6: DXM7.26 JP15.5
CTS7: DXM8.26 JP16.5
CTS8: DXM1.26 JP5.5
GND1: BT-ANTENNA101.GND C2.- C6.- C10.2 C14.2 C18.2 D6.K D105.1 DXM2.4 IC2.4 IC101.P$1 IC101.P$10 IC101.P$18 IC101.P$19 IC101.P$29 IC101.P$38 IC101.P$AGND IC101.P$BGND IC105.P$15 JP2-OBD2.3 JP2.3 R2.2 R117.1 R125.2 T2.2 T6.2
GND2: BT-ANTENNA102.GND C3.- C7.- C11.2 C15.2 C19.2 D7.K D106.1 DXM3.4 IC3.4 IC102.P$1 IC102.P$10 IC102.P$18 IC102.P$19 IC102.P$29 IC102.P$38 IC102.P$AGND IC102.P$BGND IC106.P$15 JP2-OBD3.3 JP3.3 R3.2 R118.1 R126.2 T3.2 T7.2
GND3: BT-ANTENNA103.GND C4.- C8.- C12.2 C16.2 C20.2 D8.K D107.1 DXM4.4 IC4.4 IC103.P$1 IC103.P$10 IC103.P$18 IC103.P$19 IC103.P$29 IC103.P$38 IC103.P$AGND IC103.P$BGND IC107.P$15 JP2-OBD4.3 JP4.3 R4.2 R119.1 R127.2 T4.2 T8.2
GND4: BT-ANTENNA104.GND C21.- C25.- C29.2 C33.2 C37.2 D17.K D112.1 DXM5.4 IC5.4 IC108.P$1 IC108.P$10 IC108.P$18 IC108.P$19 IC108.P$29 IC108.P$38 IC108.P$AGND IC108.P$BGND IC112.P$15 JP2-OBD5.3 JP9.3 R21.2 R144.1 R152.2 T9.2 T13.2
GND5: BT-ANTENNA105.GND C22.- C26.- C30.2 C34.2 C38.2 D18.K D113.1 DXM6.4 IC6.4 IC109.P$1 IC109.P$10 IC109.P$18 IC109.P$19 IC109.P$29 IC109.P$38 IC109.P$AGND IC109.P$BGND IC113.P$15 JP2-OBD6.3 JP10.3 R22.2 R145.1 R153.2 T10.2 T14.2
GND6: BT-ANTENNA106.GND C23.- C27.- C31.2 C35.2 C39.2 D19.K D114.1 DXM7.4 IC7.4 IC110.P$1 IC110.P$10 IC110.P$18 IC110.P$19 IC110.P$29 IC110.P$38 IC110.P$AGND IC110.P$BGND IC114.P$15 JP2-OBD7.3 JP11.3 R23.2 R146.1 R154.2 T11.2 T15.2
GND7: BT-ANTENNA107.GND C24.- C28.- C32.2 C36.2 C40.2 D20.K D115.1 DXM8.4 IC8.4 IC111.P$1 IC111.P$10 IC111.P$18 IC111.P$19 IC111.P$29 IC111.P$38 IC111.P$AGND IC111.P$BGND IC115.P$15 JP2-OBD8.3 JP12.3 R24.2 R147.1 R155.2 T12.2 T16.2
GND8: BT-ANTENNA100.GND C1.- C5.- C9.2 C13.2 C17.2 D5.K D104.1 DXM1.4 IC1.4 IC100.P$1 IC100.P$10 IC100.P$18 IC100.P$19 IC100.P$29 IC100.P$38 IC100.P$AGND IC100.P$BGND IC104.P$15 JP1.3 JP2-OBD1.3 R1.2 R116.1 R124.2 T1.2 T5.2
HS_CAN-H1: JP1-OBD2.1 REL2.2
HS_CAN-H2: JP1-OBD3.1 REL3.2
HS_CAN-H3: JP1-OBD4.1 REL4.2
HS_CAN-H4: JP1-OBD5.1 REL5.2
HS_CAN-H5: JP1-OBD6.1 REL6.2
HS_CAN-H6: JP1-OBD7.1 REL7.2
HS_CAN-H7: JP1-OBD8.1 REL8.2
HS_CAN-H8: JP1-OBD1.1 REL1.2
HS_CAN-L1: JP1-OBD2.2 REL2.7
HS_CAN-L2: JP1-OBD3.2 REL3.7
HS_CAN-L3: JP1-OBD4.2 REL4.7
HS_CAN-L4: JP1-OBD5.2 REL5.7
HS_CAN-L5: JP1-OBD6.2 REL6.7
HS_CAN-L6: JP1-OBD7.2 REL7.7
HS_CAN-L7: JP1-OBD8.2 REL8.7
HS_CAN-L8: JP1-OBD1.2 REL1.7
K-LINE1: DXM2.33 JP3-OBD2.2
K-LINE2: DXM3.33 JP3-OBD3.2
K-LINE3: DXM4.33 JP3-OBD4.2
K-LINE4: DXM5.33 JP3-OBD5.2
K-LINE5: DXM6.33 JP3-OBD6.2
K-LINE6: DXM7.33 JP3-OBD7.2
K-LINE7: DXM8.33 JP3-OBD8.2
K-LINE8: DXM1.33 JP3-OBD1.2
L-LINE1: DXM2.34 JP3-OBD2.1
L-LINE2: DXM3.34 JP3-OBD3.1
L-LINE3: DXM4.34 JP3-OBD4.1
L-LINE4: DXM5.34 JP3-OBD5.1
L-LINE5: DXM6.34 JP3-OBD6.1
L-LINE6: DXM7.34 JP3-OBD7.1
L-LINE7: DXM8.34 JP3-OBD8.1
L-LINE8: DXM1.34 JP3-OBD1.1
MISO1: DXM2.22 JP6.6
MISO2: DXM3.22 JP7.6
MISO3: DXM4.22 JP8.6
MISO4: DXM5.22 JP13.6
MISO5: DXM6.22 JP14.6
MISO6: DXM7.22 JP15.6
MISO7: DXM8.22 JP16.6
MISO8: DXM1.22 JP5.6
MODE1: DXM2.28 R105.1
MODE2: DXM2.29 R101.1
MODE3: DXM3.28 R106.1
MODE4: DXM3.29 R102.1
MODE5: DXM4.28 R107.1
MODE6: DXM4.29 R103.1
MODE7: DXM5.28 R132.1
MODE8: DXM5.29 R128.1
MODE9: DXM6.28 R133.1
MODE10: DXM6.29 R129.1
MODE11: DXM7.28 R134.1
MODE12: DXM7.29 R130.1
MODE13: DXM8.28 R135.1
MODE14: DXM8.29 R131.1
MODE17: DXM1.28 R104.1
MODE18: DXM1.29 R100.1
MOSI1: DXM2.23 JP6.8
MOSI2: DXM3.23 JP7.8
MOSI3: DXM4.23 JP8.8
MOSI4: DXM5.23 JP13.8
MOSI5: DXM6.23 JP14.8
MOSI6: DXM7.23 JP15.8
MOSI7: DXM8.23 JP16.8
MOSI8: DXM1.23 JP5.8
MS_CAN-H1: JP1-OBD2.3 REL2.4
MS_CAN-H2: JP1-OBD3.3 REL3.4
MS_CAN-H3: JP1-OBD4.3 REL4.4
MS_CAN-H4: JP1-OBD5.3 REL5.4
MS_CAN-H5: JP1-OBD6.3 REL6.4
MS_CAN-H6: JP1-OBD7.3 REL7.4
MS_CAN-H7: JP1-OBD8.3 REL8.4
MS_CAN-H8: JP1-OBD1.3 REL1.4
MS_CAN-L1: JP1-OBD2.4 REL2.5
MS_CAN-L2: JP1-OBD3.4 REL3.5
MS_CAN-L3: JP1-OBD4.4 REL4.5
MS_CAN-L4: JP1-OBD5.4 REL5.5
MS_CAN-L5: JP1-OBD6.4 REL6.5
MS_CAN-L6: JP1-OBD7.4 REL7.5
MS_CAN-L7: JP1-OBD8.4 REL8.5
MS_CAN-L8: JP1-OBD1.4 REL1.5
N$1: C18.1 IC2.3
N$2: IC2.1 IC2.7 IC2.8 R109.1 R113.1 R121.1
N$3: IC2.5 R16.1 R125.1
N$4: D6.AR R105.2
N$5: D6.AG R101.2
N$6: D2.K R2.1
N$7: D2.A DXM2.15
N$8: DXM2.17 R15.1 R117.2
N$9: R10.2 T6.1
N$10: DXM2.32 REL2.3
N$11: DXM2.31 REL2.6
N$12: SG2.2 SG6.(-)LEAD T2.3
N$13: R6.2 T2.1
N$14: DXM2.12 R10.1
N$15: DXM2.13 R6.1
N$16: D10.A R15.2 REL2.8 T6.3
N$17: D105.3 IC2.2 L2.P$2 L6.2
N$18: C19.1 IC3.3
N$19: IC3.1 IC3.7 IC3.8 R110.1 R114.1 R122.1
N$20: IC3.5 R18.1 R126.1
N$21: D7.AR R106.2
N$22: D7.AG R102.2
N$23: D3.K R3.1
N$24: D3.A DXM3.15
N$25: DXM3.17 R17.1 R118.2
N$26: R11.2 T7.1
N$27: DXM3.32 REL3.3
N$28: DXM3.31 REL3.6
N$29: SG3.2 SG7.(-)LEAD T3.3
N$30: R7.2 T3.1
N$31: DXM3.12 R11.1
N$32: DXM3.13 R7.1
N$33: D11.A R17.2 REL3.8 T7.3
N$34: D106.3 IC3.2 L3.P$2 L7.2
N$35: C20.1 IC4.3
N$36: IC4.1 IC4.7 IC4.8 R111.1 R115.1 R123.1
N$37: IC4.5 R20.1 R127.1
N$38: D8.AR R107.2
N$39: D8.AG R103.2
N$40: D4.K R4.1
N$41: D4.A DXM4.15
N$42: DXM4.17 R19.1 R119.2
N$43: R12.2 T8.1
N$44: DXM4.32 REL4.3
N$45: DXM4.31 REL4.6
N$46: SG4.2 SG8.(-)LEAD T4.3
N$47: R8.2 T4.1
N$48: DXM4.12 R12.1
N$49: DXM4.13 R8.1
N$50: D12.A R19.2 REL4.8 T8.3
N$51: D107.3 IC4.2 L4.P$2 L8.2
N$52: C37.1 IC5.3
N$53: IC5.1 IC5.7 IC5.8 R136.1 R140.1 R148.1
N$54: IC5.5 R34.1 R152.1
N$55: D17.AR R132.2
N$56: D17.AG R128.2
N$57: D13.K R21.1
N$58: D13.A DXM5.15
N$59: DXM5.17 R33.1 R144.2
N$60: R29.2 T13.1
N$61: DXM5.32 REL5.3
N$62: DXM5.31 REL5.6
N$63: SG9.2 SG13.(-)LEAD T9.3
N$64: R25.2 T9.1
N$65: DXM5.12 R29.1
N$66: DXM5.13 R25.1
N$67: D21.A R33.2 REL5.8 T13.3
N$68: D112.3 IC5.2 L9.P$2 L13.2
N$69: C38.1 IC6.3
N$70: IC6.1 IC6.7 IC6.8 R137.1 R141.1 R149.1
N$71: IC6.5 R36.1 R153.1
N$72: D18.AR R133.2
N$73: D18.AG R129.2
N$74: D14.K R22.1
N$75: D14.A DXM6.15
N$76: DXM6.17 R35.1 R145.2
N$77: R30.2 T14.1
N$78: DXM6.32 REL6.3
N$79: DXM6.31 REL6.6
N$80: SG10.2 SG14.(-)LEAD T10.3
N$81: R26.2 T10.1
N$82: DXM6.12 R30.1
N$83: DXM6.13 R26.1
N$84: D22.A R35.2 REL6.8 T14.3
N$85: D113.3 IC6.2 L10.P$2 L14.2
N$86: C39.1 IC7.3
N$87: IC7.1 IC7.7 IC7.8 R138.1 R142.1 R150.1
N$88: IC7.5 R38.1 R154.1
N$89: D19.AR R134.2
N$90: D19.AG R130.2
N$91: D15.K R23.1
N$92: D15.A DXM7.15
N$93: DXM7.17 R37.1 R146.2
N$94: R31.2 T15.1
N$95: DXM7.32 REL7.3
N$96: DXM7.31 REL7.6
N$97: SG11.2 SG15.(-)LEAD T11.3
N$98: R27.2 T11.1
N$99: DXM7.12 R31.1
N$100: DXM7.13 R27.1
N$101: D23.A R37.2 REL7.8 T15.3
N$102: D114.3 IC7.2 L11.P$2 L15.2
N$103: C40.1 IC8.3
N$104: IC8.1 IC8.7 IC8.8 R139.1 R143.1 R151.1
N$105: IC8.5 R40.1 R155.1
N$106: D20.AR R135.2
N$107: D20.AG R131.2
N$108: D16.K R24.1
N$109: D16.A DXM8.15
N$110: DXM8.17 R39.1 R147.2
N$111: R32.2 T16.1
N$112: DXM8.32 REL8.3
N$113: DXM8.31 REL8.6
N$114: SG12.2 SG16.(-)LEAD T12.3
N$115: R28.2 T12.1
N$116: DXM8.12 R32.1
N$117: DXM8.13 R28.1
N$118: D24.A R39.2 REL8.8 T16.3
N$119: D115.3 IC8.2 L12.P$2 L16.2
N$137: C17.1 IC1.3
N$138: IC1.1 IC1.7 IC1.8 R108.1 R112.1 R120.1
N$139: IC1.5 R14.1 R124.1
N$140: D5.AR R104.2
N$141: D5.AG R100.2
N$142: D1.K R1.1
N$143: D1.A DXM1.15
N$144: DXM1.17 R13.1 R116.2
N$145: R9.2 T5.1
N$146: DXM1.32 REL1.3
N$147: DXM1.31 REL1.6
N$148: SG1.2 SG5.(-)LEAD T1.3
N$149: R5.2 T1.1
N$150: DXM1.12 R9.1
N$151: DXM1.13 R5.1
N$152: D9.A R13.2 REL1.8 T5.3
N$153: D104.3 IC1.2 L1.P$2 L5.2
PWM+1: DXM2.2 JP3-OBD2.3
PWM+2: DXM3.2 JP3-OBD3.3
PWM+3: DXM4.2 JP3-OBD4.3
PWM+4: DXM5.2 JP3-OBD5.3
PWM+5: DXM6.2 JP3-OBD6.3
PWM+6: DXM7.2 JP3-OBD7.3
PWM+7: DXM8.2 JP3-OBD8.3
PWM+8: DXM1.2 JP3-OBD1.3
PWM-1: DXM2.3 JP3-OBD2.4
PWM-2: DXM3.3 JP3-OBD3.4
PWM-3: DXM4.3 JP3-OBD4.4
PWM-4: DXM5.3 JP3-OBD5.4
PWM-5: DXM6.3 JP3-OBD6.4
PWM-6: DXM7.3 JP3-OBD7.4
PWM-7: DXM8.3 JP3-OBD8.4
PWM-8: DXM1.3 JP3-OBD1.4
RESET-1: DXM2.30 IC101.P$16 IC105.P$21 JP6.1
RESET-2: DXM3.30 IC102.P$16 IC106.P$21 JP7.1
RESET-3: DXM4.30 IC103.P$16 IC107.P$21 JP8.1
RESET-4: DXM5.30 IC108.P$16 IC112.P$21 JP13.1
RESET-5: DXM6.30 IC109.P$16 IC113.P$21 JP14.1
RESET-6: DXM7.30 IC110.P$16 IC114.P$21 JP15.1
RESET-7: DXM8.30 IC111.P$16 IC115.P$21 JP16.1
RESET-8: DXM1.30 IC100.P$16 IC104.P$21 JP5.1
RESETN1: DXM2.11 JP2.4
RESETN2: DXM3.11 JP3.4
RESETN3: DXM4.11 JP4.4
RESETN4: DXM5.11 JP9.4
RESETN5: DXM6.11 JP10.4
RESETN6: DXM7.11 JP11.4
RESETN7: DXM8.11 JP12.4
RESETN8: DXM1.11 JP1.4
RF1: BT-ANTENNA101.RF IC101.P$37
RF2: BT-ANTENNA102.RF IC102.P$37
RF3: BT-ANTENNA103.RF IC103.P$37
RF4: BT-ANTENNA104.RF IC108.P$37
RF5: BT-ANTENNA105.RF IC109.P$37
RF6: BT-ANTENNA106.RF IC110.P$37
RF7: BT-ANTENNA107.RF IC111.P$37
RF8: BT-ANTENNA100.RF IC100.P$37
RTS1: DXM2.27 JP6.7
RTS2: DXM3.27 JP7.7
RTS3: DXM4.27 JP8.7
RTS4: DXM5.27 JP13.7
RTS5: DXM6.27 JP14.7
RTS6: DXM7.27 JP15.7
RTS7: DXM8.27 JP16.7
RTS8: DXM1.27 JP5.7
RX1: IC101.P$26 IC105.P$10 JP2.5
RX2: IC102.P$26 IC106.P$10 JP3.5
RX3: IC103.P$26 IC107.P$10 JP4.5
RX4: IC108.P$26 IC112.P$10 JP9.5
RX5: IC109.P$26 IC113.P$10 JP10.5
RX6: IC110.P$26 IC114.P$10 JP11.5
RX7: IC111.P$26 IC115.P$10 JP12.5
RX8: IC100.P$26 IC104.P$10 JP1.5
RXD1: DXM2.25 JP2.8
RXD2: DXM3.25 JP3.8
RXD3: DXM4.25 JP4.8
RXD4: DXM5.25 JP9.8
RXD5: DXM6.25 JP10.8
RXD6: DXM7.25 JP11.8
RXD7: DXM8.25 JP12.8
RXD8: DXM1.25 JP1.8
SCK1: DXM2.20 JP6.4
SCK2: DXM3.20 JP7.4
SCK3: DXM4.20 JP8.4
SCK4: DXM5.20 JP13.4
SCK5: DXM6.20 JP14.4
SCK6: DXM7.20 JP15.4
SCK7: DXM8.20 JP16.4
SCK8: DXM1.20 JP5.4
TX1: IC101.P$27 IC105.P$9 JP2.7
TX2: IC102.P$27 IC106.P$9 JP3.7
TX3: IC103.P$27 IC107.P$9 JP4.7
TX4: IC108.P$27 IC112.P$9 JP9.7
TX5: IC109.P$27 IC113.P$9 JP10.7
TX6: IC110.P$27 IC114.P$9 JP11.7
TX7: IC111.P$27 IC115.P$9 JP12.7
TX8: IC100.P$27 IC104.P$9 JP1.7
TXD1: DXM2.24 JP2.6
TXD2: DXM3.24 JP3.6
TXD3: DXM4.24 JP4.6
TXD4: DXM5.24 JP9.6
TXD5: DXM6.24 JP10.6
TXD6: DXM7.24 JP11.6
TXD7: DXM8.24 JP12.6
TXD8: DXM1.24 JP1.6

## Tracks (layer width: path | path; a pad name or v marks a point on that pad's centre or on a via)
12V_DOUT1  (via drill 0.61)
  Top 0.254: 57.14,62.44 C10.1
  Top 0.61: C6.+ 72.22,68.16 73.02,68.16 v73.02,64.98 73.02,64.51 73.02,61.81 73.02,61.65 73.02,60.7 72.7,60.38 69.37,60.38 | 57.14,62.44 57.14,63.55 v57.3,63.71 | v53.97,96.1 53.81,96.1 47.94,96.1 DXM2.1 | v55.4,93.4 55.4,87.84 55.4,70.54 55.4,67.84 56.03,67.2 v57.3,67.2 62.54,67.2 68.89,60.85 69.13,60.62 | v61.91,60.54 61.91,56.25 IC2.6 | 69.37,60.38 | 69.37,60.38 69.13,60.62 | 69.13,60.62 v67.78,60.54
  Bottom 0.254: D101.C 71.91,56.57 | v57.3,67.2 57.46,67.05
  Bottom 0.61: 71.91,56.57 71.91,57.68 70.64,58.95 70,59.59 70,59.74 70,62.44 70.16,62.6 70.64,63.08 70.8,63.08 71.11,63.08 v73.02,64.98 | v57.3,67.2 v57.3,63.71 58.09,63.71 59.05,62.76 | v55.4,93.4 53.97,94.83 53.97,94.99 v53.97,96.1 | v61.91,60.54 61.91,61.33 61.11,62.12 59.68,62.12 59.05,62.76 | 59.05,62.76 58.57,63.24 59.05,62.76 | R113.2 67.78,59.59 67.78,59.29 R121.2 | R113.2 R109.2 | v67.78,60.54 R113.2
12V_DOUT2  (via drill 0.61)
  Top 0.254: 97.14,62.44 C11.1
  Top 0.61: C7.+ 112.22,68.16 113.02,68.16 v113.02,64.98 113.02,64.51 113.02,61.81 113.02,61.65 113.02,60.7 112.7,60.38 109.37,60.38 | 97.14,62.44 97.14,63.55 v97.3,63.71 | v93.97,96.1 93.81,96.1 87.94,96.1 DXM3.1 | v95.4,93.4 95.4,87.84 95.4,70.54 95.4,67.84 96.03,67.2 v97.3,67.2 102.54,67.2 108.89,60.85 109.13,60.62 | v101.91,60.54 101.91,56.25 IC3.6 | 109.37,60.38 | 109.37,60.38 109.13,60.62 | 109.13,60.62 v107.78,60.54
  Bottom 0.254: D102.C 111.91,56.57 | v97.3,67.2 97.46,67.05
  Bottom 0.61: 111.91,56.57 111.91,57.68 110.64,58.95 110,59.59 110,59.74 110,62.44 110.16,62.6 110.64,63.08 110.8,63.08 111.11,63.08 v113.02,64.98 | v97.3,67.2 v97.3,63.71 98.09,63.71 99.05,62.76 | v95.4,93.4 93.97,94.83 93.97,94.99 v93.97,96.1 | v101.91,60.54 101.91,61.33 101.11,62.12 99.68,62.12 99.05,62.76 | 99.05,62.76 98.57,63.24 99.05,62.76 | R114.2 107.78,59.59 107.78,59.29 R122.2 | R114.2 R110.2 | v107.78,60.54 R114.2
12V_DOUT3  (via drill 0.61)
  Top 0.254: 137.14,62.44 C12.1
  Top 0.61: C8.+ 152.22,68.16 153.02,68.16 v153.02,64.98 153.02,64.51 153.02,61.81 153.02,61.65 153.02,60.7 152.7,60.38 149.37,60.38 | 137.14,62.44 137.14,63.55 v137.3,63.71 | v133.97,96.1 133.81,96.1 127.94,96.1 DXM4.1 | v135.4,93.4 135.4,87.84 135.4,70.54 135.4,67.84 136.03,67.2 v137.3,67.2 142.54,67.2 148.89,60.85 149.13,60.62 | v141.91,60.54 141.91,56.25 IC4.6 | 149.37,60.38 | 149.37,60.38 149.13,60.62 | 149.13,60.62 v147.78,60.54
  Bottom 0.254: D103.C 151.91,56.57 | v137.3,67.2 137.46,67.05
  Bottom 0.61: 151.91,56.57 151.91,57.68 150.64,58.95 150,59.59 150,59.74 150,62.44 150.16,62.6 150.64,63.08 150.79,63.08 151.11,63.08 v153.02,64.98 | v137.3,67.2 v137.3,63.71 138.09,63.71 139.05,62.76 | v135.4,93.4 133.97,94.83 133.97,94.99 v133.97,96.1 | v141.91,60.54 141.91,61.33 141.11,62.12 139.68,62.12 139.05,62.76 | 139.05,62.76 138.57,63.24 139.05,62.76 | R115.2 147.78,59.59 147.78,59.29 R123.2 | R115.2 R111.2 | v147.78,60.54 R115.2
12V_DOUT4  (via drill 0.61)
  Top 0.254: 17.14,12.44 C29.1
  Top 0.61: C25.+ 32.22,18.16 33.02,18.16 v33.02,14.98 33.02,14.51 33.02,11.81 33.02,11.65 33.02,10.7 32.7,10.38 29.37,10.38 | 17.14,12.44 17.14,13.55 v17.3,13.71 | v13.97,46.1 13.81,46.1 7.93,46.1 DXM5.1 | v15.4,43.4 15.4,37.84 15.4,20.54 15.4,17.84 16.03,17.2 v17.3,17.2 22.54,17.2 28.89,10.86 29.13,10.62 | v21.91,10.54 21.91,6.25 IC5.6 | 29.37,10.38 | 29.37,10.38 29.13,10.62 | 29.13,10.62 v27.78,10.54
  Bottom 0.254: D108.C 31.91,6.57 | v17.3,17.2 17.46,17.05
  Bottom 0.61: 31.91,6.57 31.91,7.68 30.64,8.95 30,9.59 30,9.74 30,12.44 30.16,12.6 30.64,13.08 30.8,13.08 31.11,13.08 v33.02,14.98 | v17.3,17.2 v17.3,13.71 18.09,13.71 19.05,12.76 | v15.4,43.4 13.97,44.83 13.97,44.99 v13.97,46.1 | v21.91,10.54 21.91,11.33 21.11,12.12 19.68,12.12 19.05,12.76 | 19.05,12.76 18.57,13.24 19.05,12.76 | R140.2 27.78,9.59 27.78,9.29 R148.2 | R140.2 R136.2 | v27.78,10.54 R140.2
12V_DOUT5  (via drill 0.61)
  Top 0.254: 57.14,12.44 C30.1
  Top 0.61: C26.+ 72.22,18.16 73.02,18.16 v73.02,14.98 73.02,14.51 73.02,11.81 73.02,11.65 73.02,10.7 72.7,10.38 69.37,10.38 | 57.14,12.44 57.14,13.55 v57.3,13.71 | v53.97,46.1 53.81,46.1 47.94,46.1 DXM6.1 | v55.4,43.4 55.4,37.84 55.4,20.54 55.4,17.84 56.03,17.2 v57.3,17.2 62.54,17.2 68.89,10.86 69.13,10.62 | v61.91,10.54 61.91,6.25 IC6.6 | 69.37,10.38 | 69.37,10.38 69.13,10.62 | 69.13,10.62 v67.78,10.54
  Bottom 0.254: D109.C 71.91,6.57 | v57.3,17.2 57.46,17.05
  Bottom 0.61: 71.91,6.57 71.91,7.68 70.64,8.95 70,9.59 70,9.74 70,12.44 70.16,12.6 70.64,13.08 70.8,13.08 71.11,13.08 v73.02,14.98 | v57.3,17.2 v57.3,13.71 58.09,13.71 59.05,12.76 | v55.4,43.4 53.97,44.83 53.97,44.99 v53.97,46.1 | v61.91,10.54 61.91,11.33 61.11,12.12 59.68,12.12 59.05,12.76 | 59.05,12.76 58.57,13.24 59.05,12.76 | R141.2 67.78,9.59 67.78,9.29 R149.2 | R141.2 R137.2 | v67.78,10.54 R141.2
12V_DOUT6  (via drill 0.61)
  Top 0.254: 97.14,12.44 C31.1
  Top 0.61: C27.+ 112.22,18.16 113.02,18.16 v113.02,14.98 113.02,14.51 113.02,11.81 113.02,11.65 113.02,10.7 112.7,10.38 109.37,10.38 | 97.14,12.44 97.14,13.55 v97.3,13.71 | v93.97,46.1 93.81,46.1 87.94,46.1 DXM7.1 | v95.4,43.4 95.4,37.84 95.4,20.54 95.4,17.84 96.03,17.2 v97.3,17.2 102.54,17.2 108.89,10.86 109.13,10.62 | v101.91,10.54 101.91,6.25 IC7.6 | 109.37,10.38 | 109.37,10.38 109.13,10.62 | 109.13,10.62 v107.78,10.54
  Bottom 0.254: D110.C 111.91,6.57 | v97.3,17.2 97.46,17.05
  Bottom 0.61: 111.91,6.57 111.91,7.68 110.64,8.95 110,9.59 110,9.74 110,12.44 110.16,12.6 110.64,13.08 110.8,13.08 111.11,13.08 v113.02,14.98 | v97.3,17.2 v97.3,13.71 98.09,13.71 99.05,12.76 | v95.4,43.4 93.97,44.83 93.97,44.99 v93.97,46.1 | v101.91,10.54 101.91,11.33 101.11,12.12 99.68,12.12 99.05,12.76 | 99.05,12.76 98.57,13.24 99.05,12.76 | R142.2 107.78,9.59 107.78,9.29 R150.2 | R142.2 R138.2 | v107.78,10.54 R142.2
12V_DOUT7  (via drill 0.61)
  Top 0.254: 137.14,12.44 C32.1
  Top 0.61: C28.+ 152.22,18.16 153.02,18.16 v153.02,14.98 153.02,14.51 153.02,11.81 153.02,11.65 153.02,10.7 152.7,10.38 149.37,10.38 | 137.14,12.44 137.14,13.55 v137.3,13.71 | v133.97,46.1 133.81,46.1 127.94,46.1 DXM8.1 | v135.4,43.4 135.4,37.84 135.4,20.54 135.4,17.84 136.03,17.2 v137.3,17.2 142.54,17.2 148.89,10.86 149.13,10.62 | v141.91,10.54 141.91,6.25 IC8.6 | 149.37,10.38 | 149.37,10.38 149.13,10.62 | 149.13,10.62 v147.78,10.54
  Bottom 0.254: D111.C 151.91,6.57 | v137.3,17.2 137.46,17.05
  Bottom 0.61: 151.91,6.57 151.91,7.68 150.64,8.95 150,9.59 150,9.74 150,12.44 150.16,12.6 150.64,13.08 150.79,13.08 151.11,13.08 v153.02,14.98 | v137.3,17.2 v137.3,13.71 138.09,13.71 139.05,12.76 | v135.4,43.4 133.97,44.83 133.97,44.99 v133.97,46.1 | v141.91,10.54 141.91,11.33 141.11,12.12 139.68,12.12 139.05,12.76 | 139.05,12.76 138.57,13.24 139.05,12.76 | R143.2 147.78,9.59 147.78,9.29 R151.2 | R143.2 R139.2 | v147.78,10.54 R143.2
12V_DOUT8  (via drill 0.61)
  Top 0.254: 17.14,62.44 C9.1
  Top 0.61: C5.+ 32.22,68.16 33.02,68.16 v33.02,64.98 33.02,64.51 33.02,61.81 33.02,61.65 33.02,60.7 32.7,60.38 29.37,60.38 | 17.14,62.44 17.14,63.55 v17.3,63.71 | v13.97,96.1 13.81,96.1 7.93,96.1 DXM1.1 | v15.4,93.4 15.4,87.84 15.4,70.54 15.4,67.84 16.03,67.2 v17.3,67.2 22.54,67.2 28.89,60.85 29.13,60.62 | v21.91,60.54 21.91,56.25 IC1.6 | 29.37,60.38 | 29.37,60.38 29.13,60.62 | 29.13,60.62 v27.78,60.54
  Bottom 0.254: D100.C 31.91,56.57 | v17.3,67.2 17.46,67.05
  Bottom 0.61: 31.91,56.57 31.91,57.68 30.64,58.95 30,59.59 30,59.74 30,62.44 30.16,62.6 30.64,63.08 30.8,63.08 31.11,63.08 v33.02,64.98 | v17.3,67.2 v17.3,63.71 18.09,63.71 19.05,62.76 | v15.4,93.4 13.97,94.83 13.97,94.99 v13.97,96.1 | v21.91,60.54 21.91,61.33 21.11,62.12 19.68,62.12 19.05,62.76 | 19.05,62.76 18.57,63.24 19.05,62.76 | R112.2 27.78,59.59 27.78,59.29 R120.2 | R112.2 R108.2 | v27.78,60.54 R112.2
+3V1  (via drill 0.61)
  Top 0.254: 57.94,59.59 57.94,57.68 | 57.14,60.38 C14.1 56.98,60.38 | 58.57,57.05 R16.2 | 47.78,71.17 DXM2.14
  Top 0.406: 57.14,60.38 57.94,59.59 | 57.94,57.68 58.57,57.05 | 56.98,60.38 54.44,60.38 52.22,58.16 L6.1 52.25,57.05 L2.P$1 | v46.03,71.17 47.78,71.17 | C2.+ 74.13,73.24 v73.65,73.71 | v65.56,86.57 65.56,74.98 v62.06,71.49
  Bottom 0.254: IC101.P$2 68.1,90.22 | 67.94,70.06 IC101.P$17 68.1,70.22 | 65.72,68.79 IC105.P$14 | 50.48,67.36 IC105.P$16
  Bottom 0.406: 68.1,90.22 71.27,93.4 71.27,94.03 JP2.1 | 67.94,70.06 67.46,70.06 66.19,68.79 65.72,68.79 | 50.48,67.36 51.74,67.36 52.38,66.73 53.65,66.73 56.19,69.27 60,69.27 60.48,68.79 61.59,68.79 | IC105.P$14 64.92,68.63 v62.06,71.49 | v62.06,71.49 | v62.06,71.49 | 62.06,69.27 61.59,68.79 | IC105.P$16 49.68,67.52 v46.03,71.17 45.24,71.17 44.76,70.7 44.76,68.95 48.41,65.3 48.41,60.38 52.06,56.73 L6.1 | v73.65,73.71 72.06,73.71 68.57,70.22 68.1,70.22 | v65.56,86.57 65.56,88.64 67.14,90.22 67.94,90.22 IC101.P$2 | 62.06,69.27 61.59,68.79 | v62.06,71.49 62.06,69.27 | v62.06,71.49 | 62.06,69.27 61.59,68.79 | v62.06,71.49 62.06,69.27
+3V2  (via drill 0.61)
  Top 0.254: 97.94,59.59 97.94,57.68 | 97.14,60.38 C15.1 96.98,60.38 | 98.57,57.05 R18.2 | 87.78,71.17 DXM3.14
  Top 0.406: 97.14,60.38 97.94,59.59 | 97.94,57.68 98.57,57.05 | 96.98,60.38 94.44,60.38 92.22,58.16 L7.1 92.25,57.05 L3.P$1 | v86.03,71.17 87.78,71.17 | C3.+ 114.13,73.24 v113.65,73.71 | v105.56,86.57 105.56,74.98 v102.06,71.49
  Bottom 0.254: IC102.P$2 108.1,90.22 | 107.94,70.06 IC102.P$17 108.1,70.22 | 105.72,68.79 IC106.P$14 | 90.47,67.36 IC106.P$16
  Bottom 0.406: 108.1,90.22 111.27,93.4 111.27,94.03 JP3.1 | 107.94,70.06 107.46,70.06 106.19,68.79 105.72,68.79 | 90.47,67.36 91.75,67.36 92.38,66.73 93.65,66.73 96.19,69.27 100,69.27 100.48,68.79 101.59,68.79 | IC106.P$14 104.92,68.63 v102.06,71.49 | v102.06,71.49 | v102.06,71.49 | 102.06,69.27 101.59,68.79 | IC106.P$16 89.68,67.52 v86.03,71.17 85.24,71.17 84.76,70.7 84.76,68.95 88.41,65.3 88.41,60.38 92.06,56.73 L7.1 | v113.65,73.71 112.06,73.71 108.57,70.22 108.1,70.22 | v105.56,86.57 105.56,88.64 107.14,90.22 107.94,90.22 IC102.P$2 | 102.06,69.27 101.59,68.79 | v102.06,71.49 102.06,69.27 | v102.06,71.49 | 102.06,69.27 101.59,68.79 | v102.06,71.49 102.06,69.27
+3V3  (via drill 0.61)
  Top 0.254: 137.94,59.59 137.94,57.68 | 137.14,60.38 C16.1 136.98,60.38 | 138.57,57.05 R20.2 | 127.78,71.17 DXM4.14
  Top 0.406: 137.14,60.38 137.94,59.59 | 137.94,57.68 138.57,57.05 | 136.98,60.38 134.44,60.38 132.22,58.16 L8.1 132.25,57.05 L4.P$1 | v126.03,71.17 127.78,71.17 | C4.+ 154.13,73.24 v153.65,73.71 | v145.56,86.57 145.56,74.98 v142.06,71.49
  Bottom 0.254: IC103.P$2 148.1,90.22 | 147.94,70.06 IC103.P$17 148.1,70.22 | 145.72,68.79 IC107.P$14 | 130.47,67.36 IC107.P$16
  Bottom 0.406: 148.1,90.22 151.27,93.4 151.27,94.03 JP4.1 | 147.94,70.06 147.46,70.06 146.19,68.79 145.72,68.79 | 130.47,67.36 131.75,67.36 132.38,66.73 133.65,66.73 136.19,69.27 140,69.27 140.48,68.79 141.59,68.79 | IC107.P$14 144.92,68.63 v142.06,71.49 | v142.06,71.49 | v142.06,71.49 | 142.06,69.27 141.59,68.79 | IC107.P$16 129.68,67.52 v126.03,71.17 125.24,71.17 124.76,70.7 124.76,68.95 128.41,65.3 128.41,60.38 132.06,56.73 L8.1 | v153.65,73.71 152.06,73.71 148.57,70.22 148.1,70.22 | v145.56,86.57 145.56,88.64 147.14,90.22 147.94,90.22 IC103.P$2 | 142.06,69.27 141.59,68.79 | v142.06,71.49 142.06,69.27 | v142.06,71.49 | 142.06,69.27 141.59,68.79 | v142.06,71.49 142.06,69.27
+3V4  (via drill 0.61)
  Top 0.254: 17.94,9.59 17.94,7.68 | 17.14,10.38 C33.1 16.98,10.38 | 18.57,7.04 R34.2 | 7.78,21.17 DXM5.14
  Top 0.406: 17.14,10.38 17.94,9.59 | 17.94,7.68 18.57,7.04 | 16.98,10.38 14.44,10.38 12.22,8.16 L13.1 12.25,7.05 L9.P$1 | v6.03,21.17 7.78,21.17 | C21.+ 34.13,23.24 v33.65,23.71 | v25.56,36.57 25.56,24.98 v22.06,21.49
  Bottom 0.254: IC108.P$2 28.1,40.22 | 27.94,20.06 IC108.P$17 28.1,20.22 | 25.71,18.79 IC112.P$14 | 10.47,17.36 IC112.P$16
  Bottom 0.406: 28.1,40.22 31.27,43.4 31.27,44.03 JP9.1 | 27.94,20.06 27.46,20.06 26.19,18.79 25.71,18.79 | 10.47,17.36 11.74,17.36 12.38,16.73 13.65,16.73 16.19,19.27 20,19.27 20.48,18.79 21.59,18.79 | IC112.P$14 24.92,18.63 v22.06,21.49 | v22.06,21.49 | v22.06,21.49 | 22.06,19.27 21.59,18.79 | IC112.P$16 9.68,17.52 v6.03,21.17 5.24,21.17 4.76,20.7 4.76,18.95 8.41,15.3 8.41,10.38 12.06,6.73 L13.1 | v33.65,23.71 32.06,23.71 28.57,20.22 28.1,20.22 | v25.56,36.57 25.56,38.64 27.14,40.22 27.94,40.22 IC108.P$2 | 22.06,19.27 21.59,18.79 | v22.06,21.49 22.06,19.27 | v22.06,21.49 | 22.06,19.27 21.59,18.79 | v22.06,21.49 22.06,19.27
+3V5  (via drill 0.61)
  Top 0.254: 57.94,9.59 57.94,7.68 | 57.14,10.38 C34.1 56.98,10.38 | 58.57,7.04 R36.2 | 47.78,21.17 DXM6.14
  Top 0.406: 57.14,10.38 57.94,9.59 | 57.94,7.68 58.57,7.04 | 56.98,10.38 54.44,10.38 52.22,8.16 L14.1 52.25,7.05 L10.P$1 | v46.03,21.17 47.78,21.17 | C22.+ 74.13,23.24 v73.65,23.71 | v65.56,36.57 65.56,24.98 v62.06,21.49
  Bottom 0.254: IC109.P$2 68.1,40.22 | 67.94,20.06 IC109.P$17 68.1,20.22 | 65.72,18.79 IC113.P$14 | 50.48,17.36 IC113.P$16
  Bottom 0.406: 68.1,40.22 71.27,43.4 71.27,44.03 JP10.1 | 67.94,20.06 67.46,20.06 66.19,18.79 65.72,18.79 | 50.48,17.36 51.74,17.36 52.38,16.73 53.65,16.73 56.19,19.27 60,19.27 60.48,18.79 61.59,18.79 | IC113.P$14 64.92,18.63 v62.06,21.49 | v62.06,21.49 | v62.06,21.49 | 62.06,19.27 61.59,18.79 | IC113.P$16 49.68,17.52 v46.03,21.17 45.24,21.17 44.76,20.7 44.76,18.95 48.41,15.3 48.41,10.38 52.06,6.73 L14.1 | v73.65,23.71 72.06,23.71 68.57,20.22 68.1,20.22 | v65.56,36.57 65.56,38.64 67.14,40.22 67.94,40.22 IC109.P$2 | 62.06,19.27 61.59,18.79 | v62.06,21.49 62.06,19.27 | v62.06,21.49 | 62.06,19.27 61.59,18.79 | v62.06,21.49 62.06,19.27
+3V6  (via drill 0.61)
  Top 0.254: 97.94,9.59 97.94,7.68 | 97.14,10.38 C35.1 96.98,10.38 | 98.57,7.04 R38.2 | 87.78,21.17 DXM7.14
  Top 0.406: 97.14,10.38 97.94,9.59 | 97.94,7.68 98.57,7.04 | 96.98,10.38 94.44,10.38 92.22,8.16 L15.1 92.25,7.05 L11.P$1 | v86.03,21.17 87.78,21.17 | C23.+ 114.13,23.24 v113.65,23.71 | v105.56,36.57 105.56,24.98 v102.06,21.49
  Bottom 0.254: IC110.P$2 108.1,40.22 | 107.94,20.06 IC110.P$17 108.1,20.22 | 105.72,18.79 IC114.P$14 | 90.47,17.36 IC114.P$16
  Bottom 0.406: 108.1,40.22 111.27,43.4 111.27,44.03 JP11.1 | 107.94,20.06 107.46,20.06 106.19,18.79 105.72,18.79 | 90.47,17.36 91.75,17.36 92.38,16.73 93.65,16.73 96.19,19.27 100,19.27 100.48,18.79 101.59,18.79 | IC114.P$14 104.92,18.63 v102.06,21.49 | v102.06,21.49 | v102.06,21.49 | 102.06,19.27 101.59,18.79 | IC114.P$16 89.68,17.52 v86.03,21.17 85.24,21.17 84.76,20.7 84.76,18.95 88.41,15.3 88.41,10.38 92.06,6.73 L15.1 | v113.65,23.71 112.06,23.71 108.57,20.22 108.1,20.22 | v105.56,36.57 105.56,38.64 107.14,40.22 107.94,40.22 IC110.P$2 | 102.06,19.27 101.59,18.79 | v102.06,21.49 102.06,19.27 | v102.06,21.49 | 102.06,19.27 101.59,18.79 | v102.06,21.49 102.06,19.27
+3V7  (via drill 0.61)
  Top 0.254: 137.94,9.59 137.94,7.68 | 137.14,10.38 C36.1 136.98,10.38 | 138.57,7.04 R40.2 | 127.78,21.17 DXM8.14
  Top 0.406: 137.14,10.38 137.94,9.59 | 137.94,7.68 138.57,7.04 | 136.98,10.38 134.44,10.38 132.22,8.16 L16.1 132.25,7.05 L12.P$1 | v126.03,21.17 127.78,21.17 | C24.+ 154.13,23.24 v153.65,23.71 | v145.56,36.57 145.56,24.98 v142.06,21.49
  Bottom 0.254: IC111.P$2 148.1,40.22 | 147.94,20.06 IC111.P$17 148.1,20.22 | 145.72,18.79 IC115.P$14 | 130.47,17.36 IC115.P$16
  Bottom 0.406: 148.1,40.22 151.27,43.4 151.27,44.03 JP12.1 | 147.94,20.06 147.46,20.06 146.19,18.79 145.72,18.79 | 130.47,17.36 131.75,17.36 132.38,16.73 133.65,16.73 136.19,19.27 140,19.27 140.48,18.79 141.59,18.79 | IC115.P$14 144.92,18.63 v142.06,21.49 | v142.06,21.49 | v142.06,21.49 | 142.06,19.27 141.59,18.79 | IC115.P$16 129.68,17.52 v126.03,21.17 125.24,21.17 124.76,20.7 124.76,18.95 128.41,15.3 128.41,10.38 132.06,6.73 L16.1 | v153.65,23.71 152.06,23.71 148.57,20.22 148.1,20.22 | v145.56,36.57 145.56,38.64 147.14,40.22 147.94,40.22 IC111.P$2 | 142.06,19.27 141.59,18.79 | v142.06,21.49 142.06,19.27 | v142.06,21.49 | 142.06,19.27 141.59,18.79 | v142.06,21.49 142.06,19.27
+3V9  (via drill 0.61)
  Top 0.254: 17.94,59.59 17.94,57.68 | 17.14,60.38 C13.1 16.98,60.38 | 18.57,57.05 R14.2 | 7.78,71.17 DXM1.14
  Top 0.406: 17.14,60.38 17.94,59.59 | 17.94,57.68 18.57,57.05 | 16.98,60.38 14.44,60.38 12.22,58.16 L5.1 12.25,57.05 L1.P$1 | v6.03,71.17 7.78,71.17 | C1.+ 34.13,73.24 v33.65,73.71 | v25.56,86.57 25.56,74.98 v22.06,71.49
  Bottom 0.254: IC100.P$2 28.1,90.22 | 27.94,70.06 IC100.P$17 28.1,70.22 | 25.71,68.79 IC104.P$14 | 10.47,67.36 IC104.P$16
  Bottom 0.406: 28.1,90.22 31.27,93.4 31.27,94.03 JP1.1 | 27.94,70.06 27.46,70.06 26.19,68.79 25.71,68.79 | 10.47,67.36 11.74,67.36 12.38,66.73 13.65,66.73 16.19,69.27 20,69.27 20.48,68.79 21.59,68.79 | IC104.P$14 24.92,68.63 v22.06,71.49 | v22.06,71.49 | v22.06,71.49 | 22.06,69.27 21.59,68.79 | IC104.P$16 9.68,67.52 v6.03,71.17 5.24,71.17 4.76,70.7 4.76,68.95 8.41,65.3 8.41,60.38 12.06,56.73 L5.1 | v33.65,73.71 32.06,73.71 28.57,70.22 28.1,70.22 | v25.56,86.57 25.56,88.64 27.14,90.22 27.94,90.22 IC100.P$2 | 22.06,69.27 21.59,68.79 | v22.06,71.49 22.06,69.27 | v22.06,71.49 | 22.06,69.27 21.59,68.79 | v22.06,71.49 22.06,69.27
+12V1  (via drill 0.61)
  Top 0.254: 47.46,56.89 SG6.(+)LEAD 47.62,56.89 | 44.76,57.2 SG2.1
  Top 0.61: 47.46,56.89 45.08,56.89 44.76,57.2 | 78.42,56.09 78.42,54.66 78.42,52.76 77.46,51.97 D10.C | 78.42,56.09 REL2.1 78.42,56.09 | v75.24,64.98 77.94,64.98 78.42,64.51 78.42,60.38 | 78.42,60.38 78.42,57.68 78.42,56.09 | v67.78,57.36 68.1,57.2 69.68,57.2 71.59,57.2 74.76,60.38 78.42,60.38 | 47.62,56.89 47.46,57.05 47.46,58.95 49.36,60.85 v49.36,62.76 | v49.36,62.76 | v50.63,59.74 50,59.11 50,55.46 50.95,54.51 54.44,54.51 JP2-OBD2.4
  Bottom 0.61: v75.24,64.98 72.06,61.81 72.06,60.85 D101.A | v67.78,57.36 66.35,55.93 59.84,55.93 56.67,52.76 JP2-OBD2.4 | v49.36,62.76 49.36,61.01 v50.63,59.74
+12V2  (via drill 0.61)
  Top 0.254: 87.46,56.89 SG7.(+)LEAD 87.62,56.89 | 84.76,57.2 SG3.1
  Top 0.61: 87.46,56.89 85.08,56.89 84.76,57.2 | 118.42,56.09 118.42,54.66 118.42,52.76 117.46,51.97 D11.C | 118.42,56.09 REL3.1 118.42,56.09 | v115.24,64.98 117.94,64.98 118.42,64.51 118.42,60.38 | 118.42,60.38 118.42,57.68 118.42,56.09 | v107.78,57.36 108.1,57.2 109.68,57.2 111.59,57.2 114.76,60.38 118.42,60.38 | 87.62,56.89 87.46,57.05 87.46,58.95 89.36,60.85 v89.36,62.76 | v89.36,62.76 | v90.63,59.74 90,59.11 90,55.46 90.95,54.51 94.44,54.51 JP2-OBD3.4
  Bottom 0.61: v115.24,64.98 112.06,61.81 112.06,60.85 D102.A | v107.78,57.36 106.35,55.93 99.84,55.93 96.67,52.76 JP2-OBD3.4 | v89.36,62.76 89.36,61.01 v90.63,59.74
+12V3  (via drill 0.61)
  Top 0.254: 127.46,56.89 SG8.(+)LEAD 127.62,56.89 | 124.76,57.2 SG4.1
  Top 0.61: 127.46,56.89 125.08,56.89 124.76,57.2 | 158.41,56.09 158.41,54.66 158.41,52.76 157.46,51.97 D12.C | 158.41,56.09 REL4.1 158.41,56.09 | v155.24,64.98 157.94,64.98 158.41,64.51 158.41,60.38 | 158.41,60.38 158.41,57.68 158.41,56.09 | v147.78,57.36 148.1,57.2 149.68,57.2 151.59,57.2 154.76,60.38 158.41,60.38 | 127.62,56.89 127.46,57.05 127.46,58.95 129.36,60.85 v129.36,62.76 | v129.36,62.76 | v130.63,59.74 130,59.11 130,55.46 130.95,54.51 134.44,54.51 JP2-OBD4.4
  Bottom 0.61: v155.24,64.98 152.06,61.81 152.06,60.85 D103.A | v147.78,57.36 146.35,55.93 139.84,55.93 136.67,52.76 JP2-OBD4.4 | v129.36,62.76 129.36,61.01 v130.63,59.74
+12V4  (via drill 0.61)
  Top 0.254: 7.46,6.89 SG13.(+)LEAD 7.62,6.89 | 4.76,7.2 SG9.1
  Top 0.61: 7.46,6.89 5.08,6.89 4.76,7.2 | 38.41,6.09 38.41,4.66 38.41,2.76 37.46,1.97 D21.C | 38.41,6.09 REL5.1 38.41,6.09 | v35.24,14.98 37.94,14.98 38.41,14.51 38.41,10.38 | 38.41,10.38 38.41,7.68 38.41,6.09 | v27.78,7.36 28.1,7.2 29.68,7.2 31.59,7.2 34.76,10.38 38.41,10.38 | 7.62,6.89 7.46,7.04 7.46,8.95 9.36,10.86 v9.36,12.76 | v9.36,12.76 | v10.63,9.74 10,9.11 10,5.46 10.95,4.5 14.44,4.5 JP2-OBD5.4
  Bottom 0.61: v35.24,14.98 32.06,11.81 32.06,10.86 D108.A | v27.78,7.36 26.35,5.93 19.84,5.93 16.67,2.76 JP2-OBD5.4 | v9.36,12.76 9.36,11.01 v10.63,9.74
+12V5  (via drill 0.61)
  Top 0.254: 47.46,6.89 SG14.(+)LEAD 47.62,6.89 | 44.76,7.2 SG10.1